# Altium PCB SlaveBoard_2020.PcbDoc (part 2 of 2)
Units mil, origin at the board's own origin, x right, y up, seen from the top; angles counter-clockwise.
Board outline 5905.51 x 3937.01 mil, 8 copper layers (Top Layer, SIG01, GND, SIG03, SIG04, PWR, SIG05, Bottom Layer), stack 60.424 mil thick; 102 components, 233 nets, 1118 pads, 683 vias.
Unrouted connection lines stored in the file: 111.
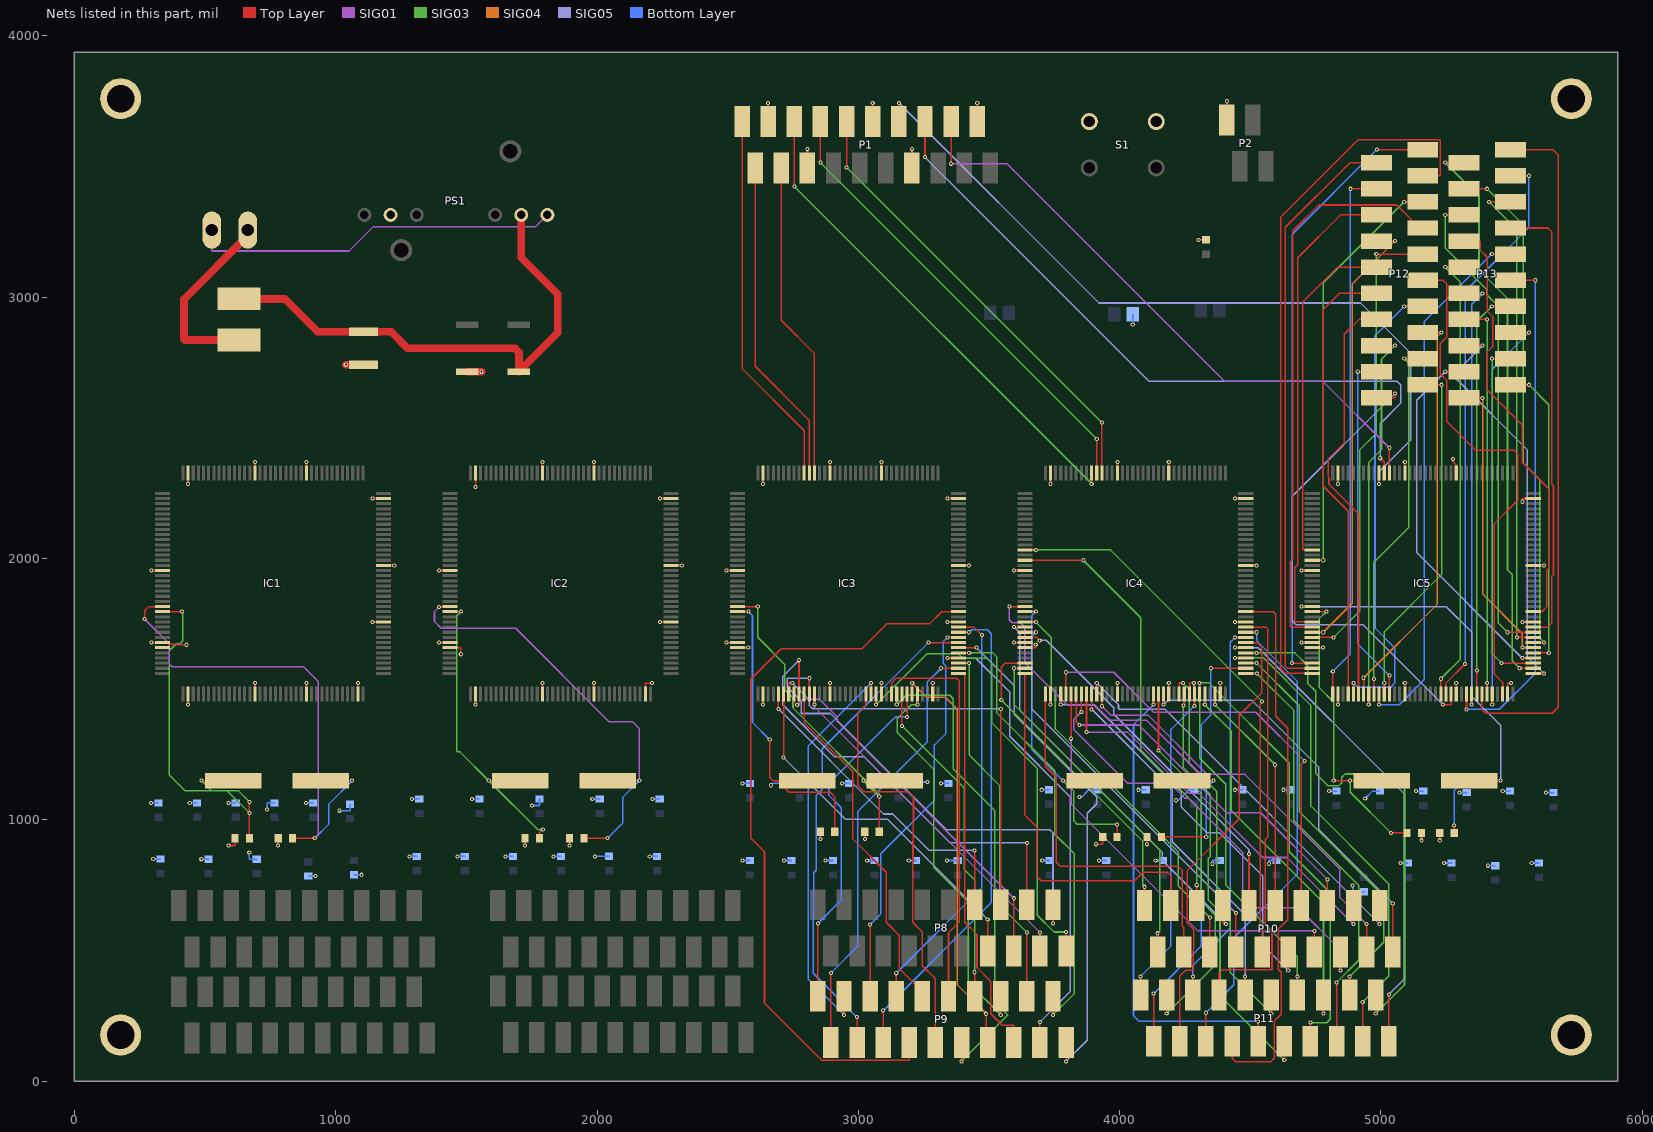
[diagram p8: the nets of this part, all layers, seen from the top]

## Via types
v1: diameter 15.75, hole 7.87, Top Layer to Bottom Layer, tented both sides, 670 vias
v2: diameter 15.75, hole 7.87, Top Layer to Bottom Layer, 13 vias

## Nets (pads, with @x,y where several pads share a name; then routed paths per layer and width w, separated by ;. In a path a pad name is that pad's centre, name@x,y a point inside that pad or via, vN(x,y) a via of type N, cw(c..) or ccw(c..) an arc to the next point about the centre after c; other vN are vias at no path point) (continued)
3_AD2_IN2: IC3.41 P8.13 | length 1240.5
  Top Layer w6: v1(2694.25,1425) IC3.41@2694.25,1482.24 ; P8.13@3445,675 v1(3445,883)
  SIG05 w6: v1(2694.25,1425) 3096.69,1022.56 3131.86,1022.56 3271.42,883 v1(3445,883)
3_AD2_IN3: IC3.42 P8.14 | length 1402.3
  Top Layer w6: v1(2713.94,1239.04) IC3.42@2713.94,1482.24 ; P8.14@3495,497.83 v1(3495,619)
  SIG05 w6: v1(2713.94,1239.04) 2950.98,1002 3112,1002 v1(3495,619)
3_AD2_IN4: IC3.43 P8.15 | length 1656
  Top Layer w6: IC3.43@2733.62,1482.24 2734,1524 v1(2747.18,1524) ; P8.15@3545,675 v1(3545,1425)
  SIG05 w6: v1(2747.18,1524) 2812.85,1458.33 2812.85,1437.5 2825.35,1425 v1(3545,1425)
3_AD2_IN5: IC3.44 P8.16 | length 1412.9
  Top Layer w6: IC3.44@2753.31,1482.24 2753.31,1452.69 v1(2766,1440) ; P8.16@3595,497.83 v1(3595,700)
  SIG01 w6: v1(2766,1440) 2786.81,1460.81 2852.02,1460.81 2918.34,1394.48 2918.34,1376.66 v1(3595,700)
3_AD2_IN11: IC3.45 P8.17 | length 1715.5
  Top Layer w6: IC3.45@2772.99,1482.24 v1(2772.99,1611) ; P8.17@3645,675 v1(3645,912)
  SIG05 w6: v1(2772.99,1611) 2710.5,1548.51 2710.5,1440.64 2909.16,1241.98 3022.02,1241.98 3352,912 v1(3645,912)
3_AD2_IN12: IC3.48 P8.18 | length 1341.9
  Top Layer w6: v1(2832,1441) v1(2832,1441) IC3.48@2832.05,1482.24 ; P8.18@3695,497.83 v1(3695,569)
  SIG01 w6: v1(2832,1441) 2832,1432 v1(3695,569)
3_AD3_IN1: IC3.47 P8.19 | length 1869.3
  Top Layer w6: IC3.47@2812.36,1482.24 v1(2812.36,1542) ; v1(3745,604) P8.19@3745,675
  SIG05 w6: v1(2812.36,1542) 2729.5,1542 2728.5,1541 2728.5,1507.87 2781.37,1455 2781.37,1408 2782.37,1407 2893,1407 3337.5,962.5 3732.5,962.5 3745,950 v1(3745,604)
3_AD3_IN2: IC3.60 P8.20 | length 1826
  Top Layer w6: v1(3068,1441) 3068.27,1441.27 IC3.60@3068.27,1482.24 ; P8.20@3795,497.83 v1(3795,571)
  SIG03 w6: v1(3068,1441) 3262,1635 3383,1635 3400,1618 3493,1618 3511,1600 3511,1371 3685,1197 3685,635 3749,571 v1(3795,571)
3_AD3_IN3: IC3.66 P9.1 | length 1364.6
  Top Layer w6: P9.1@2845,325 v1(2845,603) ; v1(3186.38,1394) IC3.66@3186.38,1482.24
  Bottom Layer w6: v1(2845,603) 2935,693 2935,1046 2887.5,1093.5 2887.5,1140.5 3141,1394 v1(3186.38,1394)
3_AD3_IN5: IC3.74 P9.2 | length 1672.9
  Top Layer w6: P9.2@2895,147.83 v1(2895,414) ; v1(3317,1580.2) IC3.74@3382.76,1580.2
  Bottom Layer w6: v1(2895,414) 2997,516 2997,1031 3264,1298 3264,1527.2 v1(3317,1580.2)
3_AD3_IN6: IC3.59 P9.3 | length 1538.7
  Top Layer w6: v1(2945,254) P9.3@2945,325 ; IC3.59@3048.58,1482.24 3048.58,1523.58 v1(3049,1524)
  Bottom Layer w6: v1(2945,254) 2809,390 2809,1284 v1(3049,1524)
3_AD3_IN7: IC3.79 P9.4 | length 1897.4
  Top Layer w6: P9.4@2995,147.83 v1(2995,245) ; v1(3268.62,1678.62) IC3.79@3382.76,1678.62
  Bottom Layer w6: v1(2995,245) 2827,413 2827,616 2829.63,618.63 2829.63,797.63 2839,807 2839,1093 2862,1116 2862,1272 v1(3268.62,1678.62)
3_AD3_IN8: IC3.80 P9.5 | length 1546
  Top Layer w6: P9.5@3045,325 v1(3045,599) ; v1(3341,1698.31) IC3.80@3382.76,1698.31
  Bottom Layer w6: v1(3045,599) 3086,640 3086,870 3291,1075 3291,1287 3335,1331 3335,1588 3325,1598 3325,1682.31 v1(3341,1698.31)
3_AD3_IN9: IC3.81 P9.6 | length 1873
  Top Layer w6: P9.6@3095,147.83 v1(3095,270) ; IC3.81@3382.76,1717.99 v1(3424,1717.99)
  Bottom Layer w6: v1(3095,270) 3509,684 3509,1712.5 3493.5,1728 3434.01,1728 v1(3424,1717.99)
3_AD3_IN10: IC3.82 P9.7 | length 1620.8
  Top Layer w6: P9.7@3145,325 v1(3145,413.28) ; IC3.82@3382.76,1737.68 3442.32,1737.68 v1(3473,1707)
  Bottom Layer w6: v1(3145,413.28) 3473,741.28 v1(3473,1707)
3_AD3_IN11: IC3.85 P9.8 | length 2874
  Top Layer w6: P9.8@3195,147.83 3195,82 3194,81 2858,81 2641,298 2641,878 2588,931 2588,1538 2705,1655 3014,1655 3109,1750 3272.27,1750 3319,1796.73 IC3.85@3382.76,1796.73
3_AD3_IN12: IC3.46 P9.9 | length 1359.2
  Top Layer w6: IC3.46@2792.68,1482.24 2792.68,1371 2978,1185.68 2978,929 3107,800 3107,608 3157,558 3157,431 3220,368 3220,325 P9.9@3245,325
3_AD3_IN13: IC3.58 P9.10 | length 1571
  Top Layer w6: IC3.58@3028.9,1482.24 3028.9,1441 2997,1409.1 2997,1133 3023,1107 3191.5,1107 3211,1087.5 3207.97,754.97 3207.97,608 3245,570.97 3245,442 3295,392 P9.10@3295,147.83
3_AD3_IN14: IC3.63 P9.11 | length 1536.5
  Top Layer w6: IC3.63@3127.32,1482.24 3127.32,1525 3144.32,1542 3376,1542 3385.87,1532.13 3385.87,609.37 3345,568.5 P9.11@3345,325
3_AD3_IN15: IC3.64 P9.12 | length 1896.4
  Top Layer w6: v1(3147,1441) IC3.64@3147.01,1482.24 ; v1(3395,76) P9.12@3395,147.83
  SIG03 w6: v1(3147,1441) 3183,1477 3350,1477 3363,1464 3363,1195 3522,1036 3522,303 3571,254 3571,252 v1(3395,76)
3_AD3_IN16: IC3.65 P9.13 | length 1272.5
  Top Layer w6: v1(3166.69,1360) IC3.65@3166.69,1482.24 ; P9.13@3445,325 v1(3445,417)
  SIG03 w6: v1(3166.69,1360) 3406,1120.69 3406,809 3445,770 v1(3445,417)
3_AD4_IN1: IC3.67 P9.14 | length 1583.3
  Top Layer w6: IC3.67@3206.06,1482.24 v1(3206.06,1524) ; v1(3489,258) 3489,196.39 3495,196.39 P9.14@3495,147.83
  SIG04 w6: v1(3206.06,1524) 3261.06,1469 3333,1469 3379,1423 3379,368 v1(3489,258)
3_AD4_IN2: IC3.68 P9.15 | length 1509.1
  Top Layer w6: v1(3225.75,1441) IC3.68@3225.75,1482.24 ; v1(3545,254) P9.15@3545,325
  SIG03 w6: v1(3225.75,1441) 3202.19,1441 3148.69,1387.5 3148.69,1334.31 3288,1195 3288,818.6 3420,686.6 3420,379 v1(3545,254)
3_AD4_IN3: IC3.73 P9.16 | length 1540
  Top Layer w6: IC3.73@3382.76,1560.51 3407,1560.51 3407,608 3454,561 3454,435 3507,382 3507,258 3551,214 3594,214 3595,213 P9.16@3595,147.83
3_AD4_IN4: IC3.75 P9.17 | length 1407.7
  Top Layer w6: IC3.75@3382.76,1599.88 v1(3424,1599.88) ; P9.17@3645,325 v1(3645,569)
  SIG03 w6: v1(3424,1599.88) 3424,1248 3542,1130 3542,672 v1(3645,569)
3_AD4_IN5: IC3.76 P9.18 | length 1819.2
  Top Layer w6: v1(3341,1619) 3341.57,1619.57 IC3.76@3382.76,1619.57 ; P9.18@3695,147.83 v1(3695,227)
  SIG05 w6: v1(3341,1619) 3449,1619 3578.98,1489.02 3578.98,1320.02 3811,1088 3811,343 v1(3695,227)
3_AD4_IN12: IC3.77 P9.19 | length 1751.5
  Top Layer w6: IC3.77@3382.76,1639.25 3424,1639.25 v1(3424.25,1639) ; v1(3745,254) P9.19@3745,325
  SIG03 w6: v1(3424.25,1639) 3515,1639 3529,1625 3529,1410.63 3752,1187.63 3752,945 3827,870 3827,336 v1(3745,254)
3_AD4_IN13: IC3.78 P9.20 | length 1963.4
  Top Layer w6: IC3.78@3382.76,1658.94 v1(3452,1658.94) ; v1(3795,76) P9.20@3795,147.83
  SIG05 w6: v1(3452,1658.94) 3597,1513.94 3597,1404 3912.5,1088.5 3912.5,1061.5 3876,1025 3876,157 v1(3795,76)
3_SPI_MISO: IC3.134 P1.19 | length 1253.1
  Top Layer w6: P1.19@2605,3495 2605,2736 2812.36,2528.64 IC3.134@2812.36,2327.76
3_SPI_MOSI: IC3.135 P1.20 | length 1442.9
  Top Layer w6: P1.20@2555,3672.17 2555,2727 2792.68,2489.32 IC3.135@2792.68,2327.76
3_SPI_SCK: IC3.133 P1.17 | length 1219.9
  Top Layer w6: P1.17@2705,3495 2705,2912 2832.05,2784.95 IC3.133@2832.05,2327.76
4_AD1_IN1: IC4.34 P10.1 | length 1235.9
  Top Layer w6: v1(3547,1459) 3547,1584.38 3562.5,1599.88 IC4.34@3637.24,1599.88 ; P10.1@4095,672.17 v1(4095,744)
  SIG03 w6: v1(3547,1459) 4089,917 4089,750 v1(4095,744)
4_AD1_IN2: IC4.35 P10.2 | length 1361.3
  Top Layer w6: v1(3596,1580.2) IC4.35@3637.24,1580.2 ; P10.2@4145,495 v1(4145,566)
  SIG03 w6: v1(3596,1580.2) 3596,1441.56 4154,883.56 4154,575 v1(4145,566)
4_AD1_IN3: IC4.36 P10.3 | length 1449
  Top Layer w6: IC4.36@3637.24,1560.51 3637,1560.51 3637,1019 3683,973 3683,784 3700,767 4057,767 4090,800 4182.5,800 4195,787.5 P10.3@4195,672.17
4_AD1_IN4: IC4.37 P10.4 | length 1471.3
  Top Layer w6: IC4.37@3715.51,1482.24 3715.51,1205.49 3757.5,1163.5 3757.5,837.5 3773,822 4225,822 4239.97,807.03 4239.97,593 4245,587.97 P10.4@4245,495
4_AD1_IN5: IC4.14 P10.5 | length 1724.9
  Top Layer w6: IC4.14@3637.24,1993.58 v1(3861,1993.58) ; P10.5@4295,672.17 v1(4295,750)
  SIG03 w6: v1(3861,1993.58) 4081,1773.58 4081,1266.97 4295,1052.97 v1(4295,750)
4_AD1_IN6: IC4.26 P10.6 | length 1580
  Top Layer w6: IC4.26@3637.24,1757.36 v1(3679,1757.36) ; P10.6@4345,495 v1(4345,626)
  SIG03 w6: v1(3679,1757.36) 3739,1697.36 3739,1508 3754,1493 3754,1347.5 4224,877.5 4224,747 v1(4345,626)
4_AD1_IN7: IC4.27 P10.7 | length 1596.7
  Top Layer w6: v1(3596.32,1738) 3596.64,1737.68 IC4.27@3637.24,1737.68 ; P10.7@4395,672.17 4396,601 v1(4407.5,601)
  SIG05 w6: v1(3596.32,1738) 3617,1717.32 3617,1421 4163,875 4163,845.5 v1(4407.5,601)
4_AD1_IN8: IC4.28 P10.8 | length 1595.3
  Top Layer w6: IC4.28@3637.24,1717.99 v1(3679,1717.99) ; P10.8@4445,495 v1(4445,643)
  SIG05 w6: v1(3679,1717.99) 3663,1701.99 3663,1425 v1(4445,643)
4_AD1_IN9: IC4.29 P10.9 | length 1422.8
  Top Layer w6: IC4.29@3637.24,1698.31 3682.69,1698.31 v1(3694,1687) ; P10.9@4495,672.17 v1(4495,870)
  SIG05 w6: v1(3694,1687) 3719.15,1687 3977.24,1428.91 3977.24,1403.78 4495,886.02 v1(4495,870)
4_AD1_IN10: IC4.12 P10.10 | length 2111.4
  Top Layer w6: IC4.12@3637.24,2032.95 v1(3679.05,2033) v1(3679.05,2033) ; P10.10@4545,495 4545,591 4538.5,597.5 4538.5,1446.5 v1(4545,1453)
  SIG03 w6: v1(3679.05,2033) 3965,2033 v1(4545,1453)
4_AD1_IN14: IC4.70 P10.11 | length 905.4
  Top Layer w6: v1(4365,1441) 4365.12,1441.12 IC4.70@4365.12,1482.24 ; P10.11@4595,672.17 v1(4595,1211)
  SIG03 w6: v1(4365,1441) v1(4595,1211)
4_AD2_IN1: IC4.40 P10.12 | length 1592.5
  Top Layer w6: v1(3774.57,1441) IC4.40@3774.57,1482.24 ; v1(4645,424) P10.12@4645,495
  SIG05 w6: v1(3774.57,1441) 3902.46,1441 4236.07,1107.39 4236.07,1049.43 4334.5,951 4382,951 4547,786 4547,522 v1(4645,424)
4_AD2_IN2: IC4.41 P10.13 | length 1695.1
  Top Layer w6: IC4.41@3794.25,1482.24 v1(3794.25,1565) ; P10.13@4695,672.17 4695,1213 v1(4707.5,1225.5)
  SIG01 w6: v1(3794.25,1565) 3977,1565 4129.75,1412.25 4520.75,1412.25 v1(4707.5,1225.5)
4_AD2_IN3: IC4.42 P10.14 | length 1633.6
  Top Layer w6: v1(3813.94,1310.68) IC4.42@3813.94,1482.24 ; P10.14@4745,495 v1(4745,575)
  SIG01 w6: v1(3813.94,1310.68) 3813.94,1061.06 4300,575 v1(4745,575)
4_AD2_IN4: IC4.43 P10.15 | length 1417.9
  Top Layer w6: IC4.43@3833.62,1482.24 3833.62,1375.5 v1(3846.12,1363) ; P10.15@4795,672.17 v1(4795,772)
  SIG01 w6: v1(3846.12,1363) 4073,1363 4408.77,1027.23 4539.77,1027.23 v1(4795,772)
4_AD2_IN5: IC4.44 P10.16 | length 1781.1
  Top Layer w6: v1(3853.31,1413.31) IC4.44@3853.31,1482.24 ; v1(4845,424) P10.16@4845,495
  SIG01 w6: v1(3853.31,1413.31) 3825,1385 3825,1345 4030.06,1139.94 4192.36,1139.94 4248.42,1083.87 4262.13,1083.87 4471,875 4471,680.5 4487.5,664 4683,664 4845,502 v1(4845,424)
4_AD2_IN11: IC4.45 P10.17 | length 1543.9
  Top Layer w6: v1(3872.99,1336) IC4.45@3872.99,1482.24 ; v1(4895,601) P10.17@4895,672.17
  SIG01 w6: v1(3872.99,1336) 4029.73,1336 4263.23,1102.5 4301.5,1102.5 4548,856 4640,856 v1(4895,601)
4_AD2_IN12: IC4.48 P10.18 | length 1574.9
  Top Layer w6: v1(3932.05,1434.95) IC4.48@3932.05,1482.24 ; P10.18@4945,495 v1(4945,601)
  SIG01 w6: v1(3932.05,1434.95) 3966,1401 4108,1401 4335,1174 4480,1174 4843,811 4843,703 v1(4945,601)
4_AD3_IN1: IC4.47 P10.19 | length 1584.6
  Top Layer w6: IC4.47@3912.36,1482.24 v1(3912.36,1524) ; v1(4994,602) 4995,603 P10.19@4995,672.17
  SIG05 w6: v1(3912.36,1524) 3995.41,1440.95 3995.41,1426 3998.41,1423 4173,1423 v1(4994,602)
4_AD3_IN2: IC4.60 P10.20 | length 1571.7
  Top Layer w6: v1(4168,1441) 4168.27,1441.27 IC4.60@4168.27,1482.24 ; P10.20@5045,495 v1(5045,680)
  SIG05 w6: v1(4168,1441) 4184,1457 4506.75,1457 4761,1202.75 4761,964 v1(5045,680)
4_AD3_IN3: IC4.66 P11.1 | length 1237.7
  Top Layer w6: P11.1@4080,330 v1(4080,401) ; v1(4286.38,1436.38) IC4.66@4286.38,1482.24
  Bottom Layer w6: v1(4080,401) 4196,517 4196,1346 v1(4286.38,1436.38)
4_AD3_IN5: IC4.74 P11.2 | length 1651.8
  Top Layer w6: P11.2@4130,152.83 v1(4130,335) ; v1(4349,1580.2) IC4.74@4482.76,1580.2
  Bottom Layer w6: v1(4130,335) 4313,518 4313,1365 4349,1401 v1(4349,1580.2)
4_AD3_IN6: IC4.59 P11.3 | length 1461.3
  Top Layer w6: v1(4148.58,1265.42) IC4.59@4148.58,1482.24 ; v1(4180,259) P11.3@4180,330
  SIG03 w6: v1(4148.58,1265.42) 4313,1101 4313,688 4366,635 4366,445 v1(4180,259)
4_AD3_IN7: IC4.79 P11.4 | length 1744.1
  Top Layer w6: P11.4@4230,152.83 4230,403 4252,425 4282,425 4283,580.97 4257.97,606 4257.97,803.97 4458,1004 4458,1400 4543,1485 4543,1662.5 4526.88,1678.62 IC4.79@4482.76,1678.62
4_AD3_IN8: IC4.80 P11.5 | length 1476.6
  Top Layer w6: P11.5@4280,330 v1(4280,401) ; v1(4441,1698) 4441.31,1698.31 IC4.80@4482.76,1698.31
  Bottom Layer w6: v1(4280,401) 4280,442.75 4422.87,585.63 4422.87,1679.87 v1(4441,1698)
4_AD3_IN9: IC4.81 P11.6 | length 1815.2
  Top Layer w6: P11.6@4330,152.83 v1(4330,262) ; IC4.81@4482.76,1717.99 v1(4524,1718)
  Bottom Layer w6: v1(4330,262) 4437,369 4437,549 4679,791 4679,1531 4524,1686 v1(4524,1718)
4_AD3_IN10: IC4.82 P11.7 | length 1697.9
  Top Layer w6: P11.7@4380,330 4380,412.5 4393.5,426 4582,426 4583,427 4583,578.97 4556.5,605.47 4556.5,923.5 4567.13,934.13 4567.13,1730.87 4560.32,1737.68 IC4.82@4482.76,1737.68
4_AD3_IN11: IC4.85 P11.8 | length 2104.9
  Top Layer w6: P11.8@4430,152.83 4430,87.5 4442.5,75 4579.5,75 4592,87.5 4592,230 4618,256 4618,417 4607,428 4607,582 4643,618 4643,1351 4597.5,1396.5 4597.5,1786.73 4587.5,1796.73 IC4.85@4482.76,1796.73
4_AD3_IN12: IC4.46 P11.9 | length 1395.5
  Top Layer w6: v1(3892.68,1422.92) IC4.46@3892.68,1482.24 ; P11.9@4480,330 v1(4480,401)
  SIG05 w6: v1(3892.68,1422.92) 4200.77,1114.82 4200.77,916.23 4480,637 v1(4480,401)
4_AD3_IN13: IC4.58 P11.10 | length 1825.6
  Top Layer w6: IC4.58@4128.9,1482.24 4128.9,1441.1 v1(4129,1441) ; P11.10@4530,152.83 v1(4530,229)
  Bottom Layer w6: v1(4129,1441) 4053,1365 4053,250 4074,229 v1(4530,229)
4_AD3_IN14: IC4.63 P11.11 | length 1531.5
  Top Layer w6: IC4.63@4227.32,1482.24 4228.32,1524 v1(4242,1524) ; v1(4580,259) P11.11@4580,330
  SIG03 w6: v1(4242,1524) 4266,1500 4266,1215.01 4371,1110.01 4371,707 4422.87,655.13 4422.87,416.13 v1(4580,259)
4_AD3_IN15: IC4.64 P11.12 | length 1640.8
  Top Layer w6: v1(4244,1438) 4247.01,1441.01 IC4.64@4247.01,1482.24 ; v1(4630,81) P11.12@4630,152.83
  SIG03 w6: v1(4244,1438) 4244,1200.01 4347,1097.01 4347,860 4339,852 4339,693 4384,648 4384,327 v1(4630,81)
4_AD3_IN16: IC4.65 P11.13 | length 1416.1
  Top Layer w6: IC4.65@4266.69,1482.24 4267.69,1524 v1(4284,1524) ; P11.13@4680,330 v1(4680,401)
  SIG03 w6: v1(4284,1524) 4284,1471 4306,1449 4306,1236 4406,1136 4406,751 4680,477 v1(4680,401)
4_AD4_IN1: IC4.67 P11.14 | length 1709.1
  Top Layer w6: IC4.67@4306.06,1482.24 v1(4306.06,1524) ; P11.14@4730,152.83 v1(4730,224)
  SIG03 w6: v1(4306.06,1524) 4342,1524 4648.94,1217.06 4648.94,878.28 4806,721.21 4806,237.5 4792.5,224 v1(4730,224)
4_AD4_IN2: IC4.68 P11.15 | length 1482.4
  Top Layer w6: v1(4325.75,1441) IC4.68@4325.75,1482.24 ; v1(4780,259) P11.15@4780,330
  SIG03 w6: v1(4325.75,1441) 4426,1340.75 4426,1037 4780,683 v1(4780,259)
4_AD4_IN3: IC4.73 P11.16 | length 1646.7
  Top Layer w6: IC4.73@4482.76,1560.51 v1(4525,1560.51) ; P11.16@4830,152.83 v1(4830,378)
  SIG03 w6: v1(4525,1560.51) 4666.94,1418.58 4666.94,997.06 4915,749 4915,463 v1(4830,378)
4_AD4_IN4: IC4.75 P11.17 | length 1567.1
  Top Layer w6: IC4.75@4482.76,1599.88 v1(4524,1599.88) ; P11.17@4880,330 v1(4880,401)
  SIG03 w6: v1(4524,1599.88) 4687.07,1436.82 4687.07,1031.93 5011,708 5011,532 v1(4880,401)
4_AD4_IN5: IC4.76 P11.18 | length 1857.5
  Top Layer w6: v1(4441,1620) 4441.43,1619.57 IC4.76@4482.76,1619.57 ; P11.18@4930,152.83 v1(4930,303)
  SIG03 w6: v1(4441,1620) 4550,1620 4732,1438 4732,1053 5029,756 5029,402 v1(4930,303)
4_AD4_IN12: IC4.77 P11.19 | length 2080.5
  Top Layer w6: IC4.77@4482.76,1639.25 4524,1639.25 v1(4524.25,1639) ; v1(4980,259) P11.19@4980,330
  SIG03 w6: v1(4524.25,1639) 4671,1639 4720,1590 4720,1522 4750,1492 4750,1177.85 4797.85,1130 4837.5,1130 4850,1142.5 4850,1163 4862.5,1175.5 5046.5,1175.5 5090,1132 5090,369 v1(4980,259)
4_AD4_IN13: IC4.78 P11.20 | length 1893.8
  Top Layer w6: v1(4441,1659) 4441.06,1658.94 IC4.78@4482.76,1658.94 ; P11.20@5030,152.83 v1(5030,332)
  SIG05 w6: v1(4441,1659) 4530,1659 5090,1099 5090,392 v1(5030,332)
4_SPI_MISO: IC4.134 P1.14 | length 1782.4
  Top Layer w6: v1(2855,3515) P1.14@2855,3672.17 ; IC4.134@3912.36,2327.76 v1(3912.36,2457.64)
  SIG03 w6: v1(2855,3515) v1(3912.36,2457.64)
4_SPI_MOSI: IC4.135 P1.16 | length 1899.4
  Top Layer w6: v1(2755,3424) P1.16@2755,3672.17 ; IC4.135@3892.68,2327.76 3892.68,2286.32 v1(3893,2286)
  SIG03 w6: v1(2755,3424) v1(3893,2286)
4_SPI_SCK: IC4.133 P1.12 | length 1749.1
  Top Layer w6: v1(2955,3497) P1.12@2955,3672.17 ; IC4.133@3932.05,2327.76 v1(3932.05,2519.95)
  SIG03 w6: v1(2955,3497) v1(3932.05,2519.95)
5_AD1_IN1: IC5.34 P12.1 | length 2352.6
  Top Layer w6: v1(4660,1599.88) IC5.34@4737.24,1599.88 ; v1(4984,3565) P12.1@5160,3565
  Bottom Layer w6: v1(4660,1599.88) 4660,3241 v1(4984,3565)
5_AD1_IN2: IC5.35 P12.2 | length 2238.1
  Top Layer w6: IC5.35@4737.24,1580.2 4641,1580.2 4634,1587.2 4634,3268 4881,3515 P12.2@4982.83,3515
5_AD1_IN3: IC5.36 P12.3 | length 2794.9
  Top Layer w6: IC5.36@4737.24,1560.51 4633.49,1560.51 4616,1578 4616,3307 4912,3603 5226,3603 5227,3602 5227,3466 5226,3465 P12.3@5160,3465
5_AD1_IN4: IC5.37 P12.4 | length 2060.5
  Top Layer w6: IC5.37@4815.51,1482.24 v1(4815.51,1568) ; v1(4883,3415) P12.4@4982.83,3415
  Bottom Layer w6: v1(4815.51,1568) 4883,1635.49 v1(4883,3415)
5_AD1_IN5: IC5.14 P12.5 | length 1612.6
  Top Layer w6: IC5.14@4737.24,1993.58 v1(4779,1993.58) ; v1(5089,3365) P12.5@5160,3365
  SIG03 w6: v1(4779,1993.58) 4779,3055 v1(5089,3365)
5_AD1_IN6: IC5.26 P12.6 | length 1834.2
  Top Layer w6: IC5.26@4737.24,1757.36 4670,1758.36 4670,1965 4681,1976 4681,3151 4845,3315 P12.6@4982.83,3315
5_AD1_IN7: IC5.27 P12.7 | length 2199.7
  Top Layer w6: IC5.27@4737.24,1737.68 4654.32,1737.68 4652,1740 4652,1988 4662,1998 4662,3254 4761,3353 5060,3353 5114,3299 5114,3265 P12.7@5160,3265
5_AD1_IN8: IC5.28 P12.8 | length 1723.8
  Top Layer w6: IC5.28@4737.24,1717.99 v1(4779,1717.99) ; P12.8@4982.83,3215 v1(5054,3215)
  SIG04 w6: v1(4779,1717.99) 4890,1828.99 4890,3051 v1(5054,3215)
5_AD1_IN9: IC5.29 P12.9 | length 1793.6
  Top Layer w6: IC5.29@4737.24,1698.31 v1(4818.31,1698.31) ; v1(4982,3165) P12.9@5160,3165
  SIG03 w6: v1(4818.31,1698.31) 4918,1798 4918,2415 4982,2479 v1(4982,3165)
5_AD1_IN10: IC5.12 P12.10 | length 1322.6
  Top Layer w6: IC5.12@4737.24,2032.95 4700,2033.95 4700,2981 4834,3115 P12.10@4982.83,3115
5_AD1_IN14: IC5.70 P12.11 | length 1934.3
  Top Layer w6: P12.11@5160,3065 5237.5,3065 5251,3051.5 5251,2847 5227,2823 5227,2707 5251,2683 5251,2525 5361,2415 5508,2415 5523,2400 5523,2223 5434,2134 5434,1557 5465.12,1525.88 IC5.70@5465.12,1482.24
5_AD2_IN1: IC5.40 P12.12 | length 1739.4
  Top Layer w6: IC5.40@4874.57,1482.24 4874.57,2181.43 4779.51,2276.49 4779.51,2953.51 4841,3015 P12.12@4982.83,3015
5_AD2_IN2: IC5.41 P12.13 | length 1803.1
  Top Layer w6: IC5.41@4894.25,1482.24 v1(4894.25,1524) ; v1(5089,2965) P12.13@5160,2965
  Bottom Layer w6: v1(4894.25,1524) 4910.25,1508 5037.5,1508 5052,1522.5 5052,1659 4977,1734 4977,2853 v1(5089,2965)
5_AD2_IN3: IC5.42 P12.14 | length 1596.9
  Top Layer w6: IC5.42@4913.94,1482.24 4913.94,2171.06 4801,2284 4801,2310 4797.51,2313.49 4797.51,2381.09 4859,2442.58 4859,2858 4916,2915 P12.14@4982.83,2915
5_AD2_IN4: IC5.43 P12.15 | length 1576.9
  Top Layer w6: IC5.43@4933.62,1482.24 v1(4933.62,1544) ; P12.15@5160,2865 v1(5231,2865)
  SIG04 w6: v1(4933.62,1544) 5216,1826.38 5216,2850 v1(5231,2865)
5_AD2_IN5: IC5.44 P12.16 | length 1528.4
  Top Layer w6: v1(4953,1441) 4953.31,1441.31 IC5.44@4953.31,1482.24 ; P12.16@4982.83,2815 v1(5054,2815)
  SIG03 w6: v1(4953,1441) 4953,2368 5002,2417 5002,2763 v1(5054,2815)
5_AD2_IN11: IC5.45 P12.17 | length 1416.7
  Top Layer w6: IC5.45@4972.99,1482.24 v1(4972.99,1539) ; v1(5089,2765) P12.17@5160,2765
  SIG03 w6: v1(4972.99,1539) 4972.99,1985.99 5107,2120 5107,2747 v1(5089,2765)
5_AD2_IN12: IC5.48 P12.18 | length 1354.7
  Top Layer w6: v1(4911,2715) P12.18@4982.83,2715 ; IC5.48@5032.05,1482.24 v1(5032.05,1552.05)
  Bottom Layer w6: v1(4911,2715) 4911,1673.1 v1(5032.05,1552.05)
5_AD3_IN1: IC5.47 P12.19 | length 1345.7
  Top Layer w6: IC5.47@5012.36,1482.24 v1(5012.36,1524) ; P12.19@5160,2665 v1(5232,2665)
  SIG03 w6: v1(5012.36,1524) 5012.36,1719 5232,1938.64 v1(5232,2665)
5_AD3_IN2: IC5.60 P12.20 | length 1902.9
  Top Layer w6: P12.20@4982.83,2615 5053,2615 5054,2616 v1(5054,2632.09) ; v1(5237,1441) 5267.27,1441 5268.27,1442 IC5.60@5268.27,1482.24
  SIG05 w6: v1(5054,2632.09) 4660,2238.09 4660,1762 4675,1747 4931,1747 v1(5237,1441)
5_AD3_IN3: IC5.66 P13.1 | length 2672.2
  Top Layer w6: IC5.66@5386.38,1482.24 5386.38,1421.62 5400,1408 5655,1408 5678.17,1431.17 5678.17,3543.83 5657,3565 P13.1@5495,3565
5_AD3_IN5: IC5.74 P13.2 | length 2176.6
  Top Layer w6: v1(5246,3515) P13.2@5317.83,3515 ; v1(5530.8,1580.2) IC5.74@5582.76,1580.2
  SIG03 w6: v1(5246,3515) 5375,3386 5375,3104 5484,2995 5484,1957 5502,1939 5502,1609 v1(5530.8,1580.2)
5_AD3_IN6: IC5.59 P13.3 | length 2185.2
  Top Layer w6: IC5.59@5248.58,1482.24 5248.58,1523.58 v1(5322,1597) ; P13.3@5495,3465 v1(5566,3465)
  Bottom Layer w6: v1(5322,1597) 5322,3023 5566,3267 v1(5566,3465)
5_AD3_IN7: IC5.79 P13.4 | length 1955.9
  Top Layer w6: P13.4@5317.83,3415 v1(5406,3415) ; IC5.79@5582.76,1678.62 5623.62,1678.62 v1(5624,1679)
  SIG03 w6: v1(5406,3415) 5545,3276 5545,2366 5608,2303 5608,1695 v1(5624,1679)
5_AD3_IN8: IC5.80 P13.5 | length 1854.9
  Top Layer w6: v1(5413.63,3365) P13.5@5495,3365 ; v1(5520,1698.31) IC5.80@5582.76,1698.31
  SIG03 w6: v1(5413.63,3365) 5520,3258.63 v1(5520,1698.31)
5_AD3_IN9: IC5.81 P13.6 | length 1866.2
  Top Layer w6: v1(5246,3315) P13.6@5317.83,3315 ; v1(5484,1717.99) IC5.81@5582.76,1717.99
  SIG03 w6: v1(5246,3315) 5246,3188.65 5405,3029.65 5405,3010 5448,2967 5448,1753.99 v1(5484,1717.99)
5_AD3_IN10: IC5.82 P13.7 | length 1744.2
  Top Layer w6: P13.7@5495,3265 5639,3265 5654,3250 5654,2284.72 5660.17,2278.55 5660.17,1937.9 5654,1931.73 5654,1754.18 5637.5,1737.68 IC5.82@5582.76,1737.68
5_AD3_IN11: IC5.85 P13.8 | length 1649.6
  Top Layer w6: P13.8@5317.83,3215 5378,3215 5379,3214 5379,3181 5407,3153 5407,2984 5406,2983 5406,2947 5427,2926 5427,2811 5406,2790 5406,2646 5541,2511 5541,2368.17 5642.17,2267 5642.17,1963.17 5635,1956 5635,1816.73 5615,1796.73 IC5.85@5582.76,1796.73
5_AD3_IN12: IC5.46 P13.9 | length 2060
  Top Layer w6: IC5.46@4992.68,1482.24 4992.68,1441.32 v1(4993,1441) ; v1(5424,3165) P13.9@5495,3165
  Bottom Layer w6: v1(4993,1441) 5070,1441 5166,1537 5166,2907 v1(5424,3165)
5_AD3_IN13: IC5.58 P13.10 | length 1759.7
  Top Layer w6: IC5.58@5228.9,1482.24 v1(5228.9,1540) ; v1(5246,3115) P13.10@5317.83,3115
  SIG03 w6: v1(5228.9,1540) 5304,1615.1 5304,3057 v1(5246,3115)
5_AD3_IN14: IC5.63 P13.11 | length 1980.1
  Top Layer w6: v1(5327.32,1423) IC5.63@5327.32,1482.24 ; P13.11@5495,3065 v1(5591,3065)
  Bottom Layer w6: v1(5327.32,1423) 5453,1423 5591,1561 v1(5591,3065)
5_AD3_IN15: IC5.64 P13.12 | length 1703.8
  Top Layer w6: P13.12@5317.83,3015 v1(5389,3015) ; v1(5347,1441) IC5.64@5347.01,1482.24
  Bottom Layer w6: v1(5347,1441) 5347,2973 v1(5389,3015)
5_AD3_IN16: IC5.65 P13.13 | length 1577.5
  Top Layer w6: IC5.65@5366.69,1482.24 v1(5366.69,1571) ; v1(5424,2965) P13.13@5495,2965
  SIG03 w6: v1(5366.69,1571) 5366.69,2907.69 v1(5424,2965)
5_AD4_IN1: IC5.67 P13.14 | length 1520.9
  Top Layer w6: P13.14@5317.83,2915 v1(5406,2915) ; v1(5406,1523.94) 5406.06,1523.87 IC5.67@5406.06,1482.24
  SIG03 w6: v1(5406,1523.94) v1(5406,2915)
5_AD4_IN2: IC5.68 P13.15 | length 1594.3
  Top Layer w6: v1(5425.75,1441) IC5.68@5425.75,1482.24 ; P13.15@5495,2865 v1(5566,2865)
  Bottom Layer w6: v1(5425.75,1441) 5425.75,2724.75 v1(5566,2865)
5_AD4_IN3: IC5.73 P13.16 | length 1548.3
  Top Layer w6: P13.16@5317.83,2815 v1(5389,2815) ; IC5.73@5582.76,1560.51 v1(5624,1560.51)
  SIG05 w6: v1(5389,2815) 5287.5,2713.5 5287.5,2688.5 5559.08,2416.92 5559.08,1625.43 v1(5624,1560.51)
5_AD4_IN4: IC5.75 P13.17 | length 1371.8
  Top Layer w6: v1(5425,2765) P13.17@5495,2765 ; v1(5461,1599.88) IC5.75@5582.76,1599.88
  SIG03 w6: v1(5425,2765) 5425,1635.88 v1(5461,1599.88)
5_AD4_IN5: IC5.76 P13.18 | length 1422.7
  Top Layer w6: v1(5246,2715) P13.18@5317.83,2715 ; v1(5541,1619) 5541.57,1619.57 IC5.76@5582.76,1619.57
  SIG05 w6: v1(5246,2715) 5136.54,2605.54 5136.54,2023.46 v1(5541,1619)
5_AD4_IN12: IC5.77 P13.19 | length 1187.7
  Top Layer w6: P13.19@5495,2665 v1(5566,2665) ; IC5.77@5582.76,1639.25 v1(5642.17,1639.25)
  SIG03 w6: v1(5566,2665) 5642.17,2588.83 v1(5642.17,1639.25)
5_AD4_IN13: IC5.78 P13.20 | length 1131.9
  Top Layer w6: P13.20@5317.83,2615 v1(5389,2615) ; v1(5541,1659) 5541.06,1658.94 IC5.78@5582.76,1658.94
  SIG04 w6: v1(5389,2615) 5389,1864 5541,1712 v1(5541,1659)
5_SPI_MISO: IC5.134 P1.6 | length 2694
  Top Layer w6: v1(3255,3536) P1.6@3255,3672.17 ; v1(4997,2384) 5012.36,2368.64 IC5.134@5012.36,2327.76
  SIG05 w6: v1(3255,3536) 4113,2678 5062.5,2678 5076,2664.5 5076,2595 4997,2516 v1(4997,2384)
5_SPI_MOSI: IC5.135 P1.8 | length 3018.8
  Top Layer w6: P1.8@3155,3672.17 v1(3155,3744) ; IC5.135@4992.68,2327.76 4992.68,2286.32 v1(4993,2286)
  SIG05 w6: v1(3155,3744) 3921,2978 4922,2978 5113,2787 5113,2453 4993,2333 v1(4993,2286)
5_SPI_SCK: IC5.133 P1.4 | length 2384.7
  Top Layer w6: v1(3355,3511) P1.4@3355,3672.17 ; IC5.133@5032.05,2327.76 v1(5032.05,2423.95)
  SIG01 w6: v1(3355,3511) 3569,3511 4402,2678 4778,2678 v1(5032.05,2423.95)
GND: C1.2 C2.2 C3.2 C4.2 C5.2 C6.2 C7.2 C8.2 C9.2 C10.2 C11.2 C12.2 C13.2 C14.2 C15.2 C16.2 C17.2 C18.2 C19.2 C20.2 C21.2 C22.2 C23.2 C24.2 C25.2 C26.2 C27.2 C28.2 C29.2 C30.2 C31.2 C32.2 C33.2 C34.2 C35.2 C36.2 C37.2 C38.2 C39.2 C40.2 C41.2 C42.2 C43.2 C44.2 C45.2 C46.2 C47.2 C48.2 C49.2 C50.2 C51.2 C52.2 C53.2 C54.2 C55.2 C56.2 C57.2 C58.2 C59.2 C60.2 C61.2 C62.2 C63.2 C64.2 C65.2 C66.2 C68.1 C69.1 IC1.16 IC1.30 IC1.31 IC1.38 IC1.51 IC1.61 IC1.71 IC1.83 IC1.94 IC1.107 IC1.120 IC1.130 IC1.143 IC2.16 IC2.30 IC2.31 IC2.38 IC2.51 IC2.61 IC2.71 IC2.83 IC2.94 IC2.107 IC2.120 IC2.130 IC2.143 IC3.16 IC3.30 IC3.31 IC3.38 IC3.51 IC3.61 IC3.71 IC3.83 IC3.94 IC3.107 IC3.120 IC3.130 IC3.143 IC4.16 IC4.30 IC4.31 IC4.38 IC4.51 IC4.61 IC4.71 IC4.83 IC4.94 IC4.107 IC4.120 IC4.130 IC4.143 IC5.16 IC5.30 IC5.31 IC5.38 IC5.51 IC5.61 IC5.71 IC5.83 IC5.94 IC5.107 IC5.120 IC5.130 IC5.143 M1.1 M2.1 M3.1 M4.1 P1.2 P1.7 P1.10 P1.15 P1.18 P2.4 P3.2 PS1.1 PS1.7 R1.1 S1.1 S1.2 | length 7308.1
  Top Layer w6: v1(295.83,1678.62) IC1.30@337.24,1678.62 ; v1(295.83,1954.21) IC1.16@337.24,1954.21 ; IC1.31@337.24,1658.94 363.28,1658.94 363.28,1671 364.72,1672.44 391.8,1672.44 394.03,1670.21 v1(428.65,1670.21) ; v1(435.2,1440.83) IC1.38@435.2,1482.24 ; v1(435.2,2286.35) IC1.143@435.2,2327.76 ; v1(589.88,901.88) 613.76,901.88 614.88,903 C2.2@614.88,930 ; IC1.51@691.1,1482.24 v1(691.1,1523.65) ; IC1.130@691.1,2327.76 v1(691.1,2369.17) ; v1(779.88,901.88) C1.2@779.88,930 ; IC1.61@887.95,1482.24 v1(887.95,1523.65) ; IC1.120@887.95,2327.76 v1(887.95,2369.17) ; IC1.71@1084.8,1482.24 v1(1084.8,1523.65) ; v1(1141.35,1757.36) IC1.83@1182.76,1757.36 ; v1(1141.35,2229.8) IC1.107@1182.76,2229.8 ; IC1.94@1182.76,1973.9 v1(1224.17,1973.9) ; v1(1395.83,1678.62) IC2.30@1437.24,1678.62 ; v1(1395.83,1954.21) IC2.16@1437.24,1954.21 ; IC2.31@1437.24,1658.94 1477,1658.94 1478.65,1657.28 v1(1478.65,1633.94) ; v1(1535.2,1440.83) IC2.38@1535.2,1482.24 ; v1(1535.2,2273.85) IC2.143@1535.2,2327.76 ; v1(1724.88,901.88) C4.2@1724.88,930 ; IC2.51@1791.1,1482.24 v1(1791.1,1523.65) ; IC2.130@1791.1,2327.76 v1(1791.1,2369.17) ; v1(1894.88,901.88) C3.2@1894.88,930 ; IC2.61@1987.95,1482.24 v1(1987.95,1523.65) ; IC2.120@1987.95,2327.76 v1(1987.95,2369.17) ; IC2.71@2184.8,1482.24 2184.8,1522.46 2186,1523.65 v1(2209.8,1523.65) ; v1(2241.35,1757.36) IC2.83@2282.76,1757.36 ; v1(2241.35,2229.8) IC2.107@2282.76,2229.8 ; IC2.94@2282.76,1973.9 v1(2324.17,1973.9) ; v1(2495.83,1678.62) IC3.30@2537.24,1678.62 ; v1(2495.83,1954.21) IC3.16@2537.24,1954.21 ; IC3.31@2537.24,1658.94 v1(2578.65,1658.94) ; v1(2635.2,1440.83) IC3.38@2635.2,1482.24 ; v1(2635.2,2286.35) IC3.143@2635.2,2327.76 ; P1.18@2655,3672.17 v1(2655,3743.6) ; P1.15@2805,3495 v1(2805,3566.43) ; v1(2854.88,926.88) C6.2@2854.88,955 ; IC3.51@2891.1,1482.24 v1(2891.1,1523.65) ; IC3.130@2891.1,2327.76 v1(2891.1,2369.17) ; v1(3024.88,926.88) C5.2@3024.88,955 ; P1.10@3055,3672.17 v1(3055,3743.6) ; IC3.61@3087.95,1482.24 v1(3087.95,1523.65) ; IC3.120@3087.95,2327.76 v1(3087.95,2369.17) ; P1.7@3205,3495 v1(3205,3566.43) ; IC3.71@3284.8,1482.24 v1(3284.8,1523.65) ; v1(3341.35,1757.36) IC3.83@3382.76,1757.36 ; v1(3341.35,2229.8) IC3.107@3382.76,2229.8 ; IC3.94@3382.76,1973.9 v1(3424.17,1973.9) ; P1.2@3455,3672.17 v1(3455,3743.6) ; v1(3595.83,1678.62) IC4.30@3637.24,1678.62 ; v1(3595.83,1954.21) IC4.16@3637.24,1954.21 ; IC4.31@3637.24,1658.94 3677.59,1658.94 3678.65,1660 v1(3678.65,1671.44) ; v1(3735.2,1440.83) IC4.38@3735.2,1482.24 ; v1(3735.2,2286.35) IC4.143@3735.2,2327.76 ; v1(3909.88,906.88) 3933.76,906.88 3934.88,908 C8.2@3934.88,935 ; IC4.51@3991.1,1482.24 v1(3991.1,1523.65) ; IC4.130@3991.1,2327.76 v1(3991.1,2369.17) ; v1(4104.88,906.88) C7.2@4104.88,935 ; IC4.61@4187.95,1482.24 v1(4187.95,1523.65) ; IC4.120@4187.95,2327.76 v1(4187.95,2369.17) ; v1(4301.88,3219.65) C66.2@4330,3219.65 ; IC4.71@4384.8,1482.24 v1(4384.8,1523.65) ; P2.4@4410,3678.58 v1(4410,3750.01) ; v1(4441.35,1757.36) IC4.83@4482.76,1757.36 ; v1(4441.35,2229.8) IC4.107@4482.76,2229.8 ; IC4.94@4482.76,1973.9 v1(4524.17,1973.9) ; v1(4695.83,1678.62) IC5.30@4737.24,1678.62 ; v1(4695.83,1954.21) IC5.16@4737.24,1954.21 ; IC5.31@4737.24,1658.94 v1(4778.65,1658.94) ; v1(4835.2,1440.83) IC5.38@4835.2,1482.24 ; v1(4835.2,2286.35) IC5.143@4835.2,2327.76 ; IC5.51@5091.1,1482.24 v1(5091.1,1523.65) ; IC5.130@5091.1,2327.76 v1(5091.1,2369.17) ; v1(5155.12,921.88) C10.2@5155.12,950 ; v1(5224.88,921.88) C9.2@5224.88,950 ; v1(5275.45,2381.67) 5275.45,2370.71 5287.95,2358.21 IC5.120@5287.95,2327.76 ; IC5.61@5287.95,1482.24 v1(5287.95,1523.65) ; IC5.71@5484.8,1482.24 5484.8,1522.46 5486,1523.65 v1(5497.3,1523.65) ; v1(5541.35,1757.36) IC5.83@5582.76,1757.36 ; v1(5541.35,2217.3) 5541.35,2228.15 5543,2229.8 IC5.107@5582.76,2229.8 ; IC5.94@5582.76,1973.9 v1(5624.17,1973.9)
  Top Layer w30: v2(1038.67,2741.83) C68.1@1106.56,2741.83 ; C69.1@1502.8,2715.06 v2(1558.08,2715.06)
  SIG01 w6: P3.2@526.1,3257.01 526.1,3178 527.1,3177 1051,3177 1143,3269 1764,3269 PS1.1@1810,3315
  Bottom Layer w6: v1(293.44,1064.94) C15.2@321.56,1064.94 ; v1(301.88,850.12) C20.2@330,850.12 ; v1(441.55,1064.94) C16.2@469.68,1064.94 ; v1(485.63,849.57) C17.2@513.75,849.57 ; v1(589.67,1064.94) C14.2@617.79,1064.94 ; v1(669.38,874.57) 669.38,851 670.8,849.57 C18.2@697.5,849.57 ; v1(737.79,1039.94) 737.79,1063.73 739,1064.94 C12.2@765.91,1064.94 ; v1(885.91,1064.94) C13.2@914.03,1064.94 ; C11.2@895,784.88 v1(923.12,784.88) ; v1(1014.38,1035.12) 1054,1035.12 1055,1036.12 C19.2@1055,1060.12 ; C21.2@1070,789.88 v1(1098.12,789.88) ; v1(1281.88,860.12) C27.2@1310,860.12 ; v1(1291.88,1080.12) C22.2@1320,1080.12 ; v1(1465.88,860.12) C28.2@1494,860.12 ; v1(1521.88,1080.12) C23.2@1550,1080.12 ; v1(1649.88,860.12) C29.2@1678,860.12 ; v1(1751.88,1055.12) 1779,1055.12 1780,1056.12 C24.2@1780,1080.12 ; v1(1833.88,860.12) C30.2@1862,860.12 ; v1(1981.88,1080.12) C25.2@2010,1080.12 ; v1(1992.88,860.59) C32.2@2046,860.59 ; v1(2201.88,860.12) C31.2@2230,860.12 ; v1(2211.88,1080.12) C26.2@2240,1080.12 ; v1(2556.88,844.65) C39.2@2585,844.65 ; v1(2556.88,1139.65) C33.2@2585,1139.65 ; v1(2665.14,1132.59) 2672.2,1139.65 C34.2@2775,1139.65 ; v1(2715.88,844.65) C40.2@2744,844.65 ; v1(2874.88,844.65) C41.2@2903,844.65 ; v1(2936.88,1139.65) C35.2@2965,1139.65 ; v1(3033.88,844.65) C42.2@3062,844.65 ; C36.2@3155,1139.65 3214.33,1139.65 3219.77,1145.09 v1(3264.86,1145.09) ; v1(3192.88,844.65) C38.2@3221,844.65 ; v1(3316.88,1139.65) C37.2@3345,1139.65 ; v1(3339.38,844.65) C43.2@3380,844.65 ; v1(3701.88,1115.12) C45.2@3730,1115.12 ; v1(3703.88,844.65) C50.2@3732,844.65 ; v1(3846.14,1087.56) 3854.46,1087.56 3882.02,1115.12 C44.2@3915,1115.12 ; v1(3920.88,844.65) C51.2@3949,844.65 ; v1(4050,2895.07) R1.1@4050,2935 ; v1(4071.88,1115.12) C46.2@4100,1115.12 ; v1(4137.88,844.65) C52.2@4166,844.65 ; v1(4216.14,1075.06) 4225,1075.06 4265.06,1115.12 C47.2@4285,1115.12 ; v1(4354.88,832.15) 4354.88,843.52 4356,844.65 C53.2@4383,844.65 ; v1(4441.88,1115.12) C48.2@4470,1115.12 ; v1(4571.88,832.15) 4571.88,843.52 4573,844.65 C54.2@4600,844.65 ; v1(4626.88,1115.12) C49.2@4655,1115.12 ; v1(4801.88,1110.12) C55.2@4830,1110.12 ; v1(4891.14,749) 4891.14,735.75 4902.02,724.88 C61.2@4935,724.88 ; v1(4939.64,1082.56) 4967.2,1110.12 C56.2@4996,1110.12 ; v1(5074.38,835.12) C62.2@5102.5,835.12 ; v1(5133.88,1110.12) C57.2@5162,1110.12 ; v1(5241.88,835.12) C63.2@5270,835.12 ; v1(5299.88,1104.65) C59.2@5328,1104.65 ; v1(5409.38,824.65) C65.2@5437.5,824.65 ; v1(5465.88,1110.12) C58.2@5494,1110.12 ; v1(5576.88,835.12) C64.2@5605,835.12 ; v1(5631.88,1104.65) C60.2@5660,1104.65
NetC1_1: C1.1 IC1.23 Y1.1 | length 2004.4
  Top Layer w6: v1(269,1768) 269,1800 285.42,1816.42 IC1.23@337.24,1816.42 ; C1.1@835,930 v1(920,930) ; Y1.1@942.32,1150 v1(1062.96,1150)
  SIG01 w6: v1(269,1768) 362.5,1674.5 362.5,1598.5 375,1586 877,1586 933,1530 933,943 v1(920,930)
  Bottom Layer w6: v1(920,930) 974,984 974,1061.04 v1(1062.96,1150)
NetC2_1: C2.1 IC1.24 Y1.2 | length 1515.6
  Top Layer w6: IC1.24@337.24,1796.73 v1(412.37,1796.73) ; v1(487.04,1150) Y1.2@607.68,1150 ; C2.1@670,930 v1(670,1026) v1(670,1069)
  SIG03 w6: v1(412.37,1796.73) 415,1794.11 415,1684.63 404.43,1674.06 390.02,1674.06 363,1647.04 363,1172 424,1111 526.04,1111 ; v1(487.04,1150) 526.04,1111 ; v1(670,1026) 585,1111 ; v1(670,1069) 628,1111 585,1111 ; 526.04,1111 585,1111
NetC3_1: C3.1 IC2.23 Y2.1 | length 1739.3
  Top Layer w6: v1(1396,1815) 1397.42,1816.42 IC2.23@1437.24,1816.42 ; C3.1@1950,930 v1(2040,930) ; Y2.1@2041.07,1150 v1(2161.71,1150)
  SIG01 w6: v1(1396,1815) 1378,1797 1378,1759 1404,1733 1689,1733 2047,1375 2136.5,1375 2161.71,1349.79 v1(2161.71,1150)
  Bottom Layer w6: v1(2040,930) 2099,989 2099,1087.29 v1(2161.71,1150)
NetC4_1: C4.1 IC2.24 Y2.2 | length 1196.8
  Top Layer w6: IC2.24@1437.24,1796.73 1478.73,1796.73 v1(1479,1797) ; v1(1585.79,1150) Y2.2@1706.43,1150 ; C4.1@1780,930 1780,950.5 v1(1792.5,963)
  SIG03 w6: v1(1479,1797) 1463,1781 1463,1260 1475.79,1260 v1(1585.79,1150) 1772.79,963 v1(1792.5,963)
NetC5_1: C5.1 IC3.23 Y3.1 | length 1338.9
  Top Layer w6: IC3.23@2537.24,1816.42 v1(2615,1816.42) ; v1(3019,1150) Y3.1@3139.82,1150 ; C5.1@3080,955 v1(3080,1089)
  SIG03 w6: v1(2615,1816.42) 2615,1698.5 2718.63,1594.87 2718.63,1498.35 2750,1466.98 2750,1428.5 3080,1098.5 v1(3080,1089) v1(3019,1150)
NetC6_1: C6.1 IC3.24 Y3.2 | length 1237.5
  Top Layer w6: IC3.24@2537.24,1796.73 2578.73,1796.73 v1(2579,1797) ; v1(2661,1307) 2661,1162.5 2673.5,1150 2690.55,1150 ; Y3.2@2805.18,1150 2690.55,1150 ; C6.1@2910,955 2910,1087.5 2892.13,1105.37 2735.17,1105.37 2690.55,1150
  Bottom Layer w6: v1(2579,1797) 2595,1781 2595,1373 v1(2661,1307)
NetC7_1: C7.1 IC4.23 Y4.1 | length 1744.8
  Top Layer w6: v1(3579,1816.42) IC4.23@3637.24,1816.42 ; C7.1@4160,935 v1(4331.33,935) ; Y4.1@4238.57,1150 v1(4359.21,1150)
  SIG01 w6: v1(3579,1816.42) 3577,1814.42 3577,1766 3589,1754 3620.5,1754 3637,1737.5 3637,1602 3800,1439 3902.54,1439 3960.54,1381 4102.54,1381 4333.54,1150 v1(4359.21,1150)
  Bottom Layer w6: v1(4331.33,935) 4331.33,1122.12 v1(4359.21,1150)
NetC8_1: C8.1 IC4.24 Y4.2 | length 1255.9
  Top Layer w6: IC4.24@3637.24,1796.73 3678.73,1796.73 v1(3679,1797) ; v1(3783.29,1150) Y4.2@3903.93,1150 ; C8.1@3990,935 v1(3990,983)
  SIG03 w6: v1(3783.29,1150) 3825,1108.29 3825,995.5 3837.5,983 v1(3990,983)
  Bottom Layer w6: v1(3679,1797) 3663,1781 3663,1270.29 v1(3783.29,1150)
NetC9_1: C9.1 IC5.23 Y5.1 | length 1824.2
  Top Layer w6: v1(4696,1816) 4696.42,1816.42 IC5.23@4737.24,1816.42 ; C9.1@5280,950 v1(5280,978) ; Y5.1@5337.32,1150 v1(5457.96,1150)
  SIG05 w6: v1(4696,1816) 5250,1816 5347,1719 5347,1472 5457.96,1361.04 v1(5457.96,1150)
  Bottom Layer w6: v1(5280,978) 5280,1112.5 5317.5,1150 v1(5457.96,1150)
NetC10_1: C10.1 IC5.24 Y5.2 | length 1245.6
  Top Layer w6: IC5.24@4737.24,1796.73 v1(4791,1796.73) ; v1(4819,1150) v1(4882.04,1150) Y5.2@5002.68,1150 ; v1(5038,950) C10.1@5100,950
  SIG03 w6: v1(4791,1796.73) 4763,1768.73 4763,1506.43 4819,1450.43 v1(4819,1150) ; v1(4882.04,1150) 4882.04,1105.96 v1(5038,950)
NetC68_2: C68.2 C70.1 L1.2 PS1.2 | length 1949.7
  Top Layer w30: L1.2@630,2993.74 805,2993.74 930.93,2867.81 C68.2@1106.56,2867.81 1212.19,2867.81 1275,2805 1685.5,2805 1700.91,2789.59 C70.1@1700.91,2715.06 1850,2864.14 1850,3011 1710,3151 PS1.2@1710,3315
NetL1_1: L1.1 P3.1 | length 729.7
  Top Layer w30: L1.1@630,2836.26 423.51,2836.26 420,2839.77 420,2992 663.9,3235.9 P3.1@663.9,3257.01
pads on no net: IC1.1 IC1.2 IC1.3 IC1.4 IC1.5 IC1.6 IC1.7 IC1.8 IC1.9 IC1.10 IC1.11 IC1.13 IC1.15 IC1.18 IC1.19 IC1.20 IC1.21 IC1.22 IC1.49 IC1.50 IC1.53 IC1.54 IC1.55 IC1.56 IC1.57 IC1.69 IC1.86 IC1.87 IC1.88 IC1.89 IC1.90 IC1.91 IC1.92 IC1.93 IC1.96 IC1.97 IC1.98 IC1.99 IC1.100 IC1.101 IC1.102 IC1.103 IC1.104 IC1.106 IC1.110 IC1.111 IC1.112 IC1.113 IC1.114 IC1.115 IC1.116 IC1.117 IC1.118 IC1.119 IC1.122 IC1.123 IC1.124 IC1.125 IC1.126 IC1.127 IC1.128 IC1.129 IC1.132 IC1.136 IC1.137 IC1.139 IC1.140 IC1.141 IC1.142 IC2.1 IC2.2 IC2.3 IC2.4 IC2.5 IC2.6 IC2.7 IC2.8 IC2.9 IC2.10 IC2.11 IC2.13 IC2.15 IC2.18 IC2.19 IC2.20 IC2.21 IC2.22 IC2.49 IC2.50 IC2.53 IC2.54 IC2.55 IC2.56 IC2.57 IC2.69 IC2.86 IC2.87 IC2.88 IC2.89 IC2.90 IC2.91 IC2.92 IC2.93 IC2.96 IC2.97 IC2.98 IC2.99 IC2.100 IC2.101 IC2.102 IC2.103 IC2.104 IC2.106 IC2.110 IC2.111 IC2.112 IC2.113 IC2.114 IC2.115 IC2.116 IC2.117 IC2.118 IC2.119 IC2.122 IC2.123 IC2.124 IC2.125 IC2.126 IC2.127 IC2.128 IC2.129 IC2.132 IC2.136 IC2.137 IC2.139 IC2.140 IC2.141 IC2.142 IC3.1 IC3.2 IC3.3 IC3.4 IC3.5 IC3.6 IC3.7 IC3.8 IC3.9 IC3.10 IC3.11 IC3.13 IC3.15 IC3.18 IC3.19 IC3.20 IC3.21 IC3.22 IC3.49 IC3.50 IC3.53 IC3.54 IC3.55 IC3.56 IC3.57 IC3.69 IC3.86 IC3.87 IC3.88 IC3.89 IC3.90 IC3.91 IC3.92 IC3.93 IC3.96 IC3.97 IC3.98 IC3.99 IC3.100 IC3.101 IC3.102 IC3.103 IC3.104 IC3.106 IC3.110 IC3.111 IC3.112 IC3.113 IC3.114 IC3.115 IC3.116 IC3.117 IC3.118 IC3.119 IC3.122 IC3.123 IC3.124 IC3.125 IC3.126 IC3.127 IC3.128 IC3.129 IC3.132 IC3.136 IC3.137 IC3.139 IC3.140 IC3.141 IC3.142 IC4.1 IC4.2 IC4.3 IC4.4 IC4.5 IC4.6 IC4.7 IC4.8 IC4.9 IC4.10 IC4.11 IC4.13 IC4.15 IC4.18 IC4.19 IC4.20 IC4.21 IC4.22 IC4.49 IC4.50 IC4.53 IC4.54 IC4.55 IC4.56 IC4.57 IC4.69 IC4.86 IC4.87 IC4.88 IC4.89 IC4.90 IC4.91 IC4.92 IC4.93 IC4.96 IC4.97 IC4.98 IC4.99 IC4.100 IC4.101 IC4.102 IC4.103 IC4.104 IC4.106 IC4.110 IC4.111 IC4.112 IC4.113 IC4.114 IC4.115 IC4.116 IC4.117 IC4.118 IC4.119 IC4.122 IC4.123 IC4.124 IC4.125 IC4.126 IC4.127 IC4.128 IC4.129 IC4.132 IC4.136 IC4.137 IC4.139 IC4.140 IC4.141 IC4.142 IC5.1 IC5.2 IC5.3 IC5.4 IC5.5 IC5.6 IC5.7 IC5.8 IC5.9 IC5.10 IC5.11 IC5.13 IC5.15 IC5.18 IC5.19 IC5.20 IC5.21 IC5.22 IC5.49 IC5.50 IC5.53 IC5.54 IC5.55 IC5.56 IC5.57 IC5.69 IC5.86 IC5.87 IC5.88 IC5.89 IC5.90 IC5.91 IC5.92 IC5.93 IC5.96 IC5.97 IC5.98 IC5.99 IC5.100 IC5.101 IC5.102 IC5.103 IC5.104 IC5.106 IC5.110 IC5.111 IC5.112 IC5.113 IC5.114 IC5.115 IC5.116 IC5.117 IC5.118 IC5.119 IC5.122 IC5.123 IC5.124 IC5.125 IC5.126 IC5.127 IC5.128 IC5.129 IC5.132 IC5.136 IC5.137 IC5.139 IC5.140 IC5.141 IC5.142 PS1.3 PS1.8 PS1.9 PS1.10

## Polygon pours and split planes (outlines as drawn)
GND on Bottom Layer "NONET_L-01_P-001" (solid, pour order 5): 60,3880 60,2565 1835,2565 2195,2925 2195,3875 2190,3880
GND on Bottom Layer "NONET_L-01_P-001" (solid, pour order 3): 65,2550 65,65 66.88,63.12 5842.1,63.12 5842.1,3872.9 5840,3875 2215,3875 2215,2915 1845,2545 70,2545
GND on Top Layer "NONET_L-01_P-001" (solid, pour order 4): 60,3880 60,2565 1835,2565 2195,2925 2195,3875 2190,3880
no net on Top Layer "NONET_L-01_P-001" (solid, pour order 1): 65,2550 65,65 66.88,63.12 5842.1,63.12 5842.1,3872.9 5840,3875 2215,3875 2215,2915 1845,2545 70,2545
3.3V on PWR (split plane): 5885.41,20.1 20.1,20.1 20.1,3916.91 5885.41,3916.91
3.3V on PWR (split plane): 5801.99,103.52 103.52,103.52 103.52,3833.48 5801.99,3833.48
GND on GND (split plane): 5841.36,64.15 64.15,64.15 64.15,3872.85 5841.36,3872.85
GND on GND (split plane): 5885.42,20.1 20.1,20.1 20.1,3916.91 5885.42,3916.91

## Other copper
GND (plane layer: these items are gaps in the copper):
  lines w10: 59.06,59.06 59.06,3877.95 5846.46,3877.95 5846.46,59.06 59.06,59.06
PWR (plane layer: these items are gaps in the copper):
  lines w10: 98.43,98.43 98.43,3838.58 5807.09,3838.58 5807.09,98.43 98.43,98.43

## Silkscreen, mask and mechanical layers (free items; w line width, h text height)
Top Overlay:
  text "STlink" at 4720,3405 h60 r180
  text "Reset" at 4170,3390 h60 r180
  text "Connect_Master" at 3410,3385 h60 r180
  text "PWR" at 185,3280 h60
Mechanical 1:
  lines w10: -241.99,58.43 -221.99,-1.57 ; -241.99,3875.44 -221.99,3935.44 ; -231.99,-1.57 -211.99,-1.57 ; -231.99,3935.44 -211.99,3935.44 ; -221.99,1571.05 -221.99,-1.57 ; -221.99,2362.81 -221.99,3935.44 ; -201.99,58.43 -221.99,-1.57 ; -201.99,3875.44 -221.99,3935.44 ; -8.69,-135 -8.69,-115 ; 51.31,-145 -8.69,-125 ; 51.31,-105 -8.69,-125 ; 2553.19,-125 -8.69,-125 ; 3334.95,-125 5896.82,-125 ; 5836.82,-145 5896.82,-125 ; 5836.82,-105 5896.82,-125 ; 5896.82,-135 5896.82,-115 ; 0,0 5905.51,0 5905.51,3937.01 0,3937.01 0,0
  text "3937.008 (mil)" at -186,1581.05 h60 r90
  text "5905.512 (mil)" at 2563.19,-160.99 h60

## Text inside footprints (layer, text, board x,y; h text height)
M1: Mechanical 12 "1" at 175,190 h25
M2: Mechanical 12 "1" at 5690,215 h25
M3: Mechanical 12 "1" at 5595,3625 h25
M4: Mechanical 12 "1" at 270,3600 h25